# Altium PCB PCB2.PcbDoc
Units mil, origin at the board's own origin, x right, y up, seen from the top; angles counter-clockwise.
Board outline 3010.03 x 3210.03 mil, 2 copper layers (Top Layer, Bottom Layer); 28 components, 51 nets, 208 pads, 2 vias.
Unrouted connection lines stored in the file: 135.
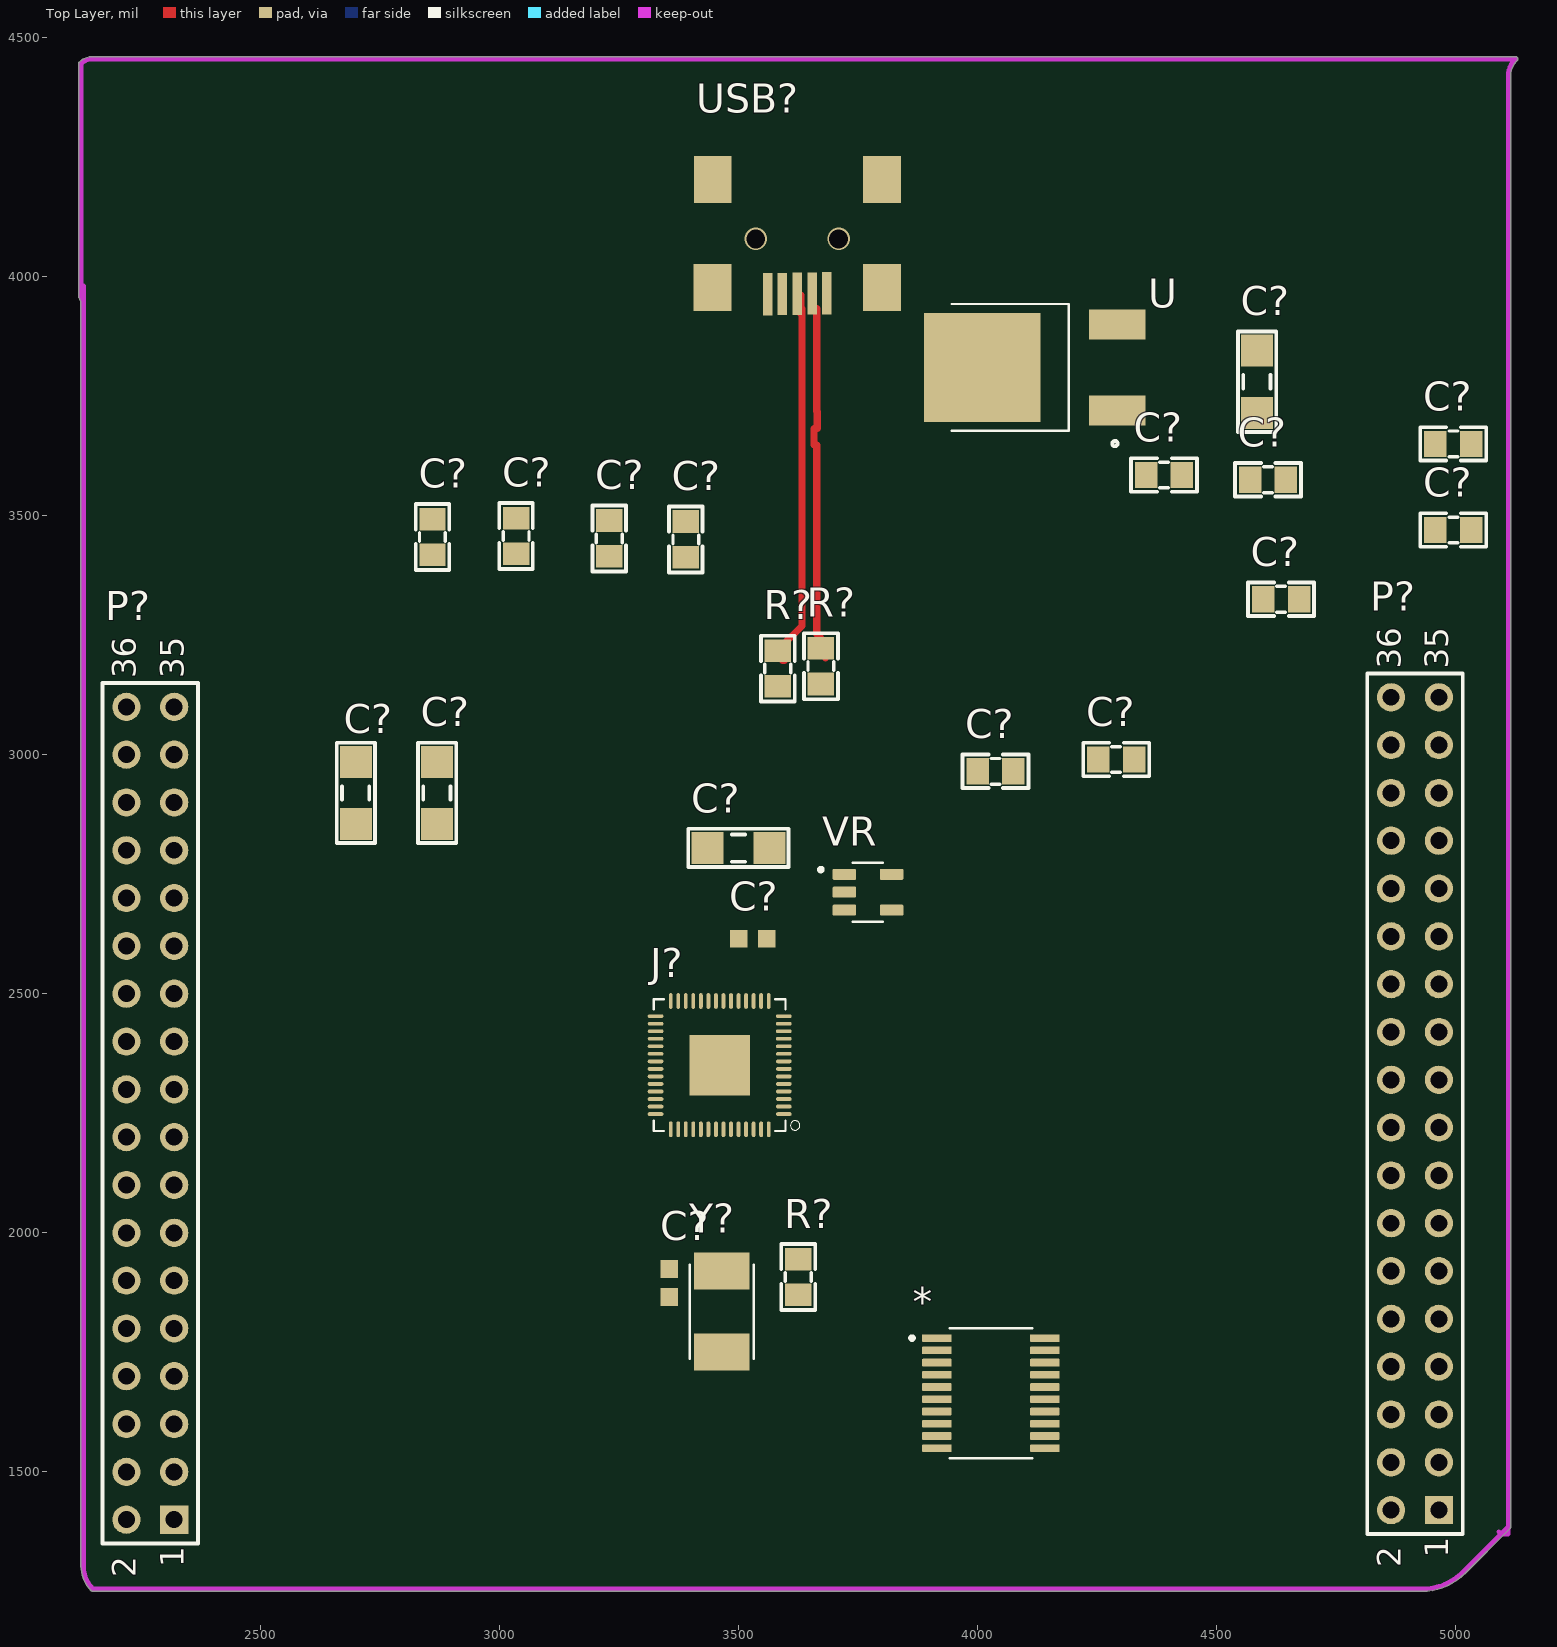
[diagram p0: Top Layer view]
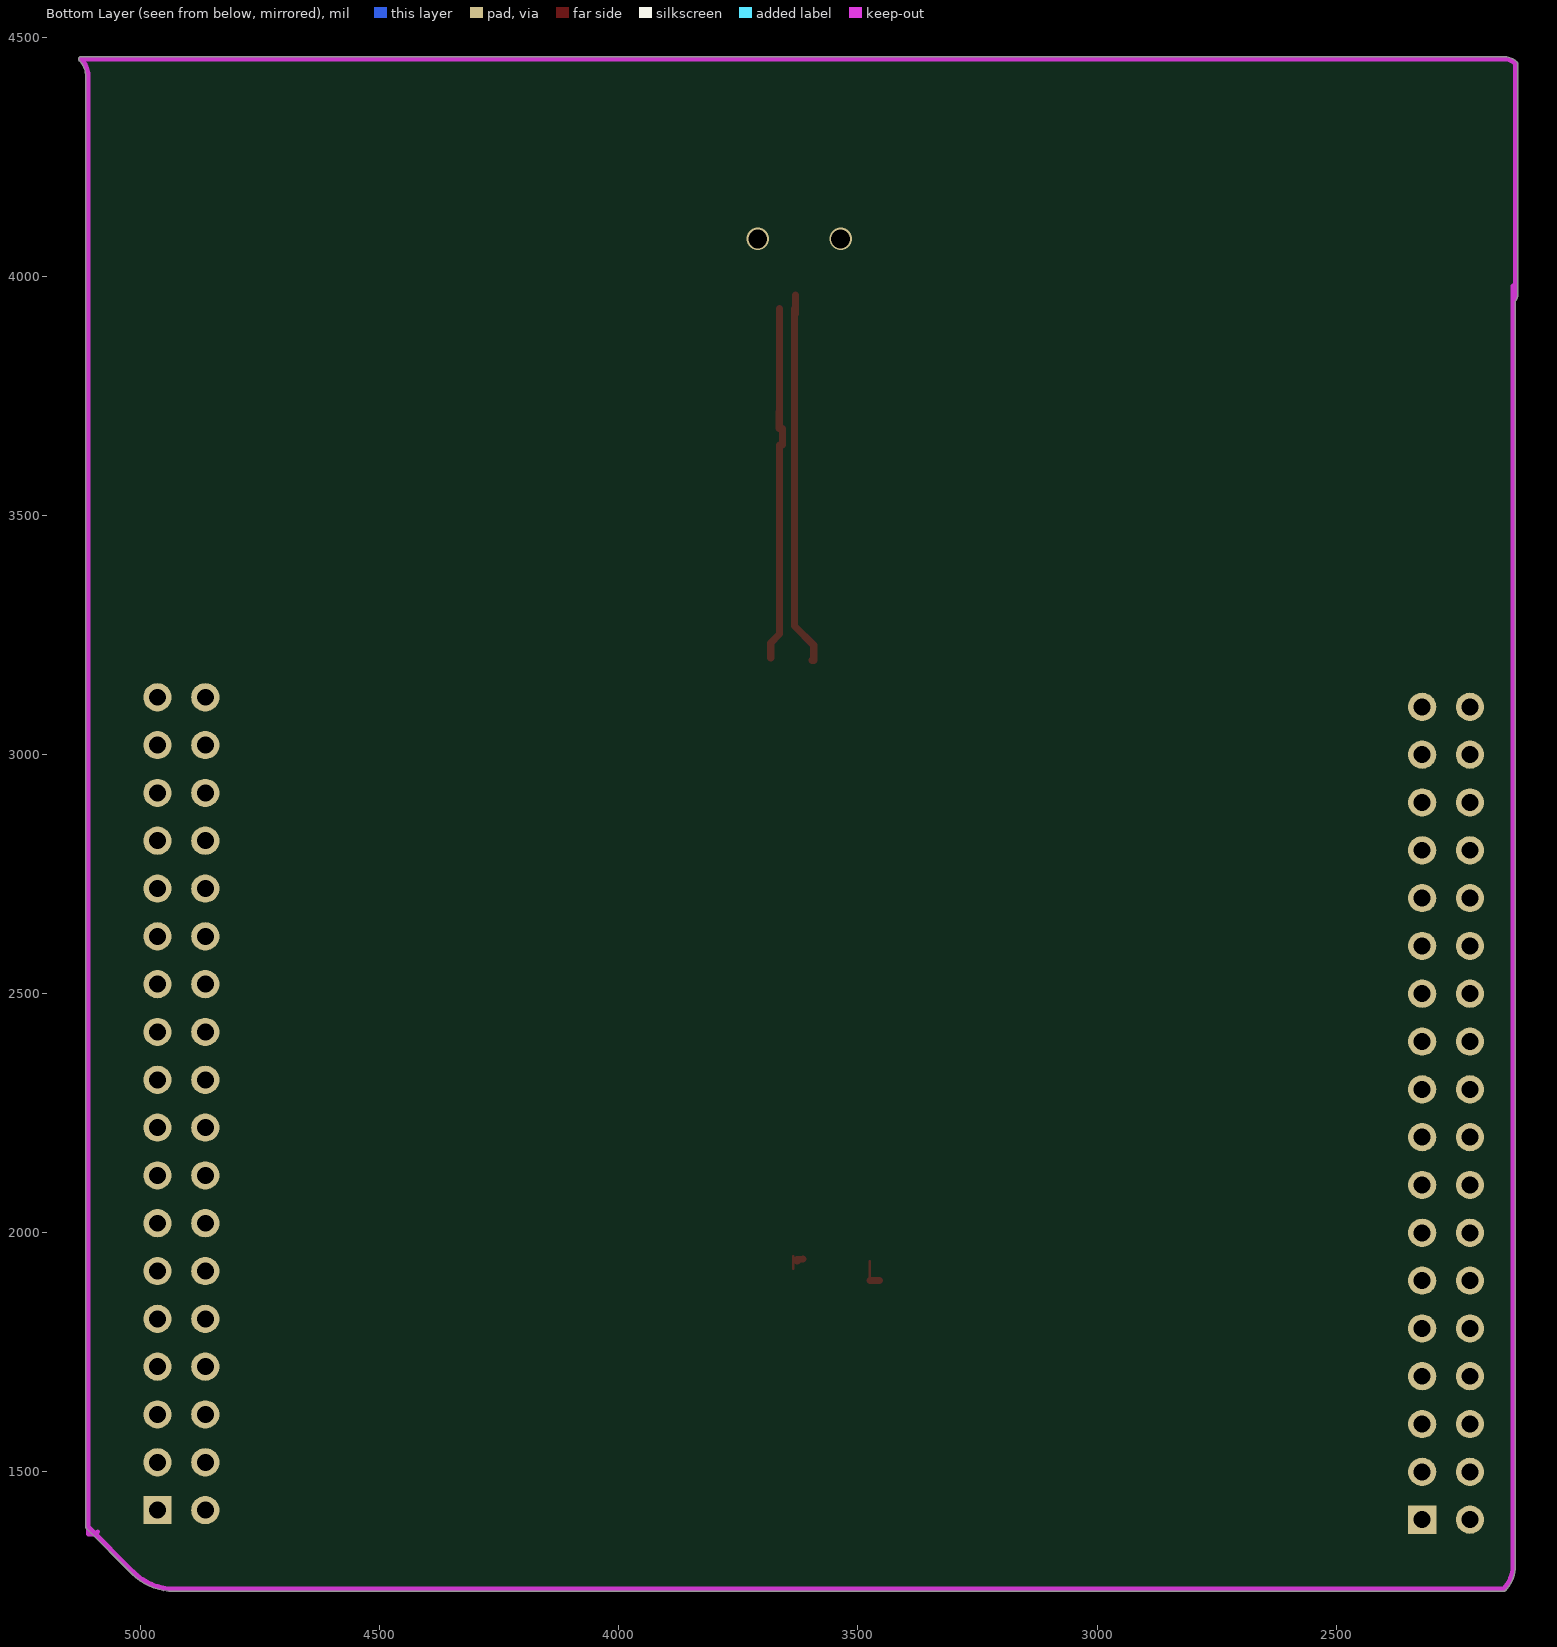
[diagram p1: Bottom Layer view, seen from below]

## Layer stack, top to bottom
Top Solder: solder mask 0.4, Solder Resist, Dk 3.5
Top Layer: signal copper 1.4
Dielectric 1: dielectric 12.6, FR-4, Dk 4.8
Bottom Layer: signal copper 1.4
Bottom Solder: solder mask 0.4, Solder Resist, Dk 3.5

## Board outline
2146.45,1251.45 cw(c2198.28,1303.28) 2124.99,1303.28 2124.99,3948.08 cw(c2142.07,3962.07) 2119.99,3962.07 2119.99,4445 cw(c2125,4445) 2121.45,4448.55 cw(c2149.14,4420.86) 2149.14,4460.02 5125,4460.02 cw(c5125,4455) 5130.02,4455 cw(c5125,4455) 5128.52,4451.43 ccw(c5161.21,4418.79) 5115.02,4418.79 5115.02,1385 cw(c5110,1385) 5113.53,1381.44 5018.9,1286.81 cw(c4930,1375.71) 4930,1249.98 2150,1249.98 cw(c2150,1255)

## Design rules (kind name [scope] priority, off if disabled: settings)
Clearance [All] p1: gap=10 ignorepadtopadclearanceinfootprint=FALSE except(0: Arc-Hole Track-Hole SMDPad-Hole THPad-Hole Via-Hole Fill-Hole Poly-Hole Region-Hole Text-Hole)
DiffPairsRouting [All] p1: maxlimit=10 minlimit=5 mostfreqgap=10 toplayer_minwidth=5 toplayer_maxwidth=15 toplayer_prefwidth=15 bottomlayer_minwidth=5 bottomlayer_maxwidth=15 bottomlayer_prefwidth=15 maxuncoupledlength=500
PolygonConnect [All] p1: connectstyle=Relief reliefconductorwidth=10 reliefentries=4 polygonreliefangle="90 Angle" airgapwidth=10
RoomDefinition Sheet2 [InComponentClass('Sheet2')] p1: confinementstyle=ConfineIn formatcopy=TRUE lockcomponents=FALSE outline 2650,2670.04 2985,2670.04 2985,3090.04 2650,3090.04
RoutingVias [All] p1: holewidth=40 width=30 viastyle="Through Hole" minholewidth=20 minwidth=10 maxholewidth=60 maxwidth=50
SolderMaskExpansion [All] p1: expansion=4 istentingtop=FALSE
Width [InNetClass('All Nets')] p1: maxlimit=15 minlimit=5 preferedwidth=10
29 further rules are at their usual default settings.

## Classes and differential pairs
net class A: USB_D+ USB_D-
component class Sheet2: * C? J? P? R? U USB? VR Y?

## Components (designator, comment, footprint, x,y, rotation, side; value= is the part's Value field where it differs from the comment)
* "PCM5101APW" PCM5101APW -12437.01,7834.57 r0 top
C? "CBR06C270F5GAC" CAPC1608X87N 3355,1895.04 r270 top
C? "CBR06C270F5GAC" CAPC1608X87N 3530,2615.04 r180 top
C? "105" "tu 0805" 4995,3650 r0 top
C? "105" "tu 0805" 4995,3470 r0 top
C? "104" "tu 0805" 4290,2990.04 r0 top
C? "104" "tu 0805" 3034.87,3457.27 r90 top
C? "103" "tu 1206" 2870,2920.04 r90 top
C? "104" "tu 0805" 4607.43,3575.21 r0 top
C? "104" "tu 0805" 4390,3585.08 r0 top
C? "104" "tu 0805" 3390,3450.04 r90 top
C? "104" "tu 0805" 2860,3455.04 r90 top
C? "104" "tu 0805" 3229.87,3452.27 r90 top
C? "103" "tu 1206" 2700,2920.04 r90 top
C? "104" "tu 0805" 4635,3325.04 r0 top
C? "104" "tu 0805" 4037.42,2965.17 r0 top
C? "105" "tu 1206" 4585,3780.04 r90 top
C? "105" "tu 1206" 3500,2805.04 r180 top
J? "RP2040" QFN40P695X695X90-57T320N 3460.85,2350.67 r180 top
P? "Header 18X2" HDR2X18 4965,1420.04 r90 top
P? "Header 18X2" HDR2X18 2320,1400.04 r90 top
R? "1k" "tro smd 0805" 3622.61,1907.47 r90 top
R? "27" "tro smd 0805" 3670,3185.04 r90 top
R? "27" "tro smd 0805" 3580,3180.04 r90 top
U "NCP1117DT33G" VREG_NCP1117DT33G 4132.05,3810.04 r90 top
USB? "USB Mini 5p SMD" "USB Mini 5p SMD" 3620,4100.04 r0 top
VR "TLV70033DDCR" SOT95P280X110-5N 3770.99,2712.38 r0 top
Y? "ABM3-12.000MHZ-B2-T" XTAL500X320X130N 3465,1835.39 r270 top

## Footprints (in the part's own frame and the unit in brackets; to place one, negate y for a bottom-side part, rotate by r counter-clockwise, add the part's x,y. Pads: shape width x height; smd on the part's side, far side on the other; paste and mask are expansions set on the pad)
CAPC1608X87N [mm]
  rect 0.94x0.93 smd: 1(-0.745,0) 2(0.745,0)
  body extent -0.8,-0.38 0.8,0.42, height 0.87
HDR2X18 [mm] "Connector; Header; 18x2 Position"
  rect 1.5x1.5 hole 0.9: 1(0,0)
  round 1.5 hole 0.9: 2(0,2.54) 3(2.54,0) 4(2.54,2.54) 5(5.08,0) 6(5.08,2.54) 7(7.62,0) 8(7.62,2.54) 9(10.16,0) 10(10.16,2.54) 11(12.7,0) 12(12.7,2.54) 13(15.24,0) 14(15.24,2.54) 15(17.78,0) 16(17.78,2.54) 17(20.32,0) 18(20.32,2.54) 19(22.86,0) 20(22.86,2.54) 21(25.4,0) 22(25.4,2.54) 23(27.94,0) 24(27.94,2.54) 25(30.48,0) 26(30.48,2.54) 27(33.02,0) 28(33.02,2.54) 29(35.56,0) 30(35.56,2.54) 31(38.1,0) 32(38.1,2.54) 33(40.64,0) 34(40.64,2.54) 35(43.18,0) 36(43.18,2.54)
  silkscreen extent -1.27,-1.27 44.45,3.81
PCM5101APW [mm]
  rrect25% 1.57x0.41 smd: 1(415.341,-153.793) 2(415.341,-154.443) 3(415.341,-155.093) 4(415.341,-155.743) 5(415.341,-156.393) 6(415.341,-157.043) 7(415.341,-157.693) 8(415.341,-158.343) 9(415.341,-158.993) 10(415.341,-159.643) 11(421.081,-159.643) 12(421.081,-158.993) 13(421.081,-158.343) 14(421.081,-157.693) 15(421.081,-157.043) 16(421.081,-156.393) 17(421.081,-155.743) 18(421.081,-155.093) 19(421.081,-154.443) 20(421.081,-153.793)
  silkscreen extent 413.92,-160.17 420.41,-153.27, body extent 415.01,-159.97 421.41,-153.47, height 1.2
QFN40P695X695X90-57T320N [mm]
  oval 0.835x0.2 smd: 1(-3.408,2.6) 2(-3.408,2.2) 3(-3.408,1.8) 4(-3.408,1.4) 5(-3.408,1) 6(-3.408,0.6) 7(-3.408,0.2) 8(-3.408,-0.2) 9(-3.408,-0.6) 10(-3.408,-1) 11(-3.408,-1.4) 12(-3.408,-1.8) 13(-3.408,-2.2) 14(-3.408,-2.6) 29(3.408,-2.6) 30(3.408,-2.2) 31(3.408,-1.8) 32(3.408,-1.4) 33(3.408,-1) 34(3.408,-0.6) 35(3.408,-0.2) 36(3.408,0.2) 37(3.408,0.6) 38(3.408,1) 39(3.408,1.4) 40(3.408,1.8) 41(3.408,2.2) 42(3.408,2.6)
  oval 0.2x0.835 smd: 15(-2.6,-3.408) 16(-2.2,-3.408) 17(-1.8,-3.408) 18(-1.4,-3.408) 19(-1,-3.408) 20(-0.6,-3.408) 21(-0.2,-3.408) 22(0.2,-3.408) 23(0.6,-3.408) 24(1,-3.408) 25(1.4,-3.408) 26(1.8,-3.408) 27(2.2,-3.408) 28(2.6,-3.408) 43(2.6,3.408) 44(2.2,3.408) 45(1.8,3.408) 46(1.4,3.408) 47(1,3.408) 48(0.6,3.408) 49(0.2,3.408) 50(-0.2,3.408) 51(-0.6,3.408) 52(-1,3.408) 53(-1.4,3.408) 54(-1.8,3.408) 55(-2.2,3.408) 56(-2.6,3.408)
  rect 3.2x3.2 smd: 57(0,0)
  silkscreen extent -4.25,-3.5 3.5,3.5, body extent -3.89,-3.9 3.86,3.85, height 0.9
SOT95P280X110-5N [mm]
  rrect25% 1.25x0.59 smd: 1(-1.255,0.95) 2(-1.255,0) 3(-1.255,-0.95) 4(1.255,-0.95) 5(1.255,0.95)
  silkscreen extent -2.6,-1.57 0.8,1.56, body extent -1.4,-1.45 1.4,1.45, height 1.1
"tro smd 0805" [mm]
  rect 1.2x1.4 smd: 1(-0.946,-0.061) 2(0.954,-0.061)
  silkscreen extent -1.75,-0.97 1.75,0.84, body extent -1.56,-0.76 1.44,0.64, height 0.53
"tu 0805" [mm] "Compoment SMD 80x50mil"
  rect 1.2x1.4 smd: 1(-0.946,-0.003) 2(0.954,-0.003)
  silkscreen extent -1.75,-0.89 1.75,0.89, body extent -1.01,-0.64 1.01,0.63, height 0.61
"tu 1206" [mm]
  rect 1.7x1.7 smd: 1(-1.65,0) 2(1.65,0)
  silkscreen extent -2.67,-1.02 2.67,1.02, body extent -1.57,-0.8 1.63,0.8, height 0.94
"USB Mini 5p SMD" [mm]
  rect 0.5x2.25 smd: 1(1.651,-3.429) 2(0.864,-3.442) 3(0.076,-3.454) 4(-0.711,-3.467) 5(-1.499,-3.48)
  rect 2x2.5 smd: 5(-4.424,-3.124) 5(-4.42,2.616) 5(4.576,-3.124) 5(4.58,2.616)
  body extent -5.27,-3.8 5.43,5.4, height 3.95
VREG_NCP1117DT33G [mm]
  rect 1.6x3 smd: 1(-2.285,-4.08) 3(2.285,-4.08)
  rect 5.8x6.2 smd: 4(0,3.1)
  silkscreen extent -4.19,-4.09 3.36,4.72, body extent -3.2,-4.95 3.3,4.95, height 2.49
XTAL500X320X130N [mm]
  rect 1.95x2.95 smd: 1(-2.15,0) 2(2.15,0)
  silkscreen extent -2.5,-1.7 2.5,1.7, body extent -2.5,-1.65 2.5,1.65, height 1.3

## Part data
C? C?: "CAP CER 27PF 50V NP0 0603", Package=None, Availability=Unavailable, MP=CBR06C270F5GAC, Price=None
C? C?: library part "Tu 0805 105 50V 10%", "Dán", Chung_Loai=Dán, Don_Vi=Con, Ma_Hang=MH004552, So_Chan=2, Ten_Linh_Kien="Tụ 0805 105-1uF 10% 50V"
C? C? C? C? C? C? C? C? C?: library part "Tu 0805 104 50V 10%", "Dán", Chung_Loai=Dán, Don_Vi=Con, Ma_Hang=MH004551, So_Chan=2, Ten_Linh_Kien="Tụ 0805 104-100nF 10% 50V"
C? C?: library part "Tu 1206 103 50V 10%", "Dán", Chung_Loai=Dán, Don_Vi=Con, Ma_Hang=MH004543, So_Chan=2, Ten_Linh_Kien="Tụ 1206 103-10nF 10% 50V"
C? C?: library part "Tu 1206 105 50V 20%", "Dán", Chung_Loai=Dán, Don_Vi=Con, Ma_Hang=MH004545, So_Chan=2, Ten_Linh_Kien="Tụ 1206 105-1uF 20% 50V"
J?: "RP2040 Raspberry Pi Pico - ARMÂ® CortexÂ®-M0+ MCU 32-Bit Embedded Evaluation Board", Package=Package, Availability="No availability data", Check_prices=https://www.snapeda.com/parts/RP2040/Raspberry%20Pi/view-part/5800506/?ref=eda, MF="Raspberry Pi", MP=RP2040, Price=None, SnapEDA_Link=https://www.snapeda.com/parts/RP2040/Raspberry%20Pi/view-part/5800506/?ref=snap
P? P?: "Header, 18-Pin, Dual row", LatestRevisionDate=17-Jul-2002, LatestRevisionNote="Re-released for DXP Platform.", Publisher="Altium Limited"
R?: library part "Tro 0805 1% 1k", "Dán", Chung_Loai=Dán, Don_Vi=Con, Ma_Hang=MH005468, So_Chan=2, Ten_Linh_Kien="Trở 0805 1% 1k"
R? R?: library part "Tro 0805 5% 100R", "Dán", Chung_Loai=Dán, Don_Vi=Con, Ma_Hang=MH005251, So_Chan=2, Ten_Linh_Kien="Trở 0805 5% 100R"
U: "Linear Voltage Regulator IC 1 Output 1A DPAK", Package="DPAK ON Semiconductor", Availability=Unavailable, MF="ON Semiconductor", MP=NCP1117DT33G, Price=None, SnapEDA_Link=https://www.snapeda.com/parts/NCP1117DT33G/ON%20Semiconductor/view-part/300669/?ref=snap
USB?: "USB Type B", Ma_Hang=MH001022, Ten="MiniUSB 5P SMD"
VR: "200-mA, high-PSRR, low-IQ, low-dropout voltage regulator with enable 5-SOT-23-THIN -40 to 125", Package="SOT-23-THN-5 Texas Instruments", BuyPart=https://www.snapeda.com/parts/TLV70033DDCR/Texas%20Instruments/view-part/356821/?ref=eda, Digi-Key_Part_Number=296-27937-1-ND, DigiKey-Purchase-URL=https://snapeda.com/shop?store=DigiKey&id=356821, MF="Texas Instruments", Mouser-Purchase-URL=https://snapeda.com/shop?store=Mouser&id=356821, MP=TLV70033DDCR, SnapEDA_Link=https://www.snapeda.com/parts/TLV70033DDCR/Texas%20Instruments/view-part/356821/?ref=snap, Texas_Instruments-Purchase-URL=https://snapeda.com/shop?store=Texas+Instruments&id=356821
Y?: "12MHz Â±20ppm Crystal 18pF 60 Ohms 2-SMD, No Lead", Package="SMD-2 Abracon", Availability=Good, Check_prices=https://www.snapeda.com/parts/ABM3-12.000MHZ-B2-T/Abracon%20LLC/view-part/106373/?ref=eda, MF=Abracon, MP=ABM3-12.000MHZ-B2-T, Price=None, Purchase-URL=https://pricing.snapeda.com/search/part/ABM3-12.000MHZ-B2-T/?ref=eda, SnapEDA_Link=https://www.snapeda.com/parts/ABM3-12.000MHZ-B2-T/Abracon%20LLC/view-part/106373/?ref=snap

## Via types
v1: diameter 47.24, hole 39.37, Top Layer to Bottom Layer, 2 vias

## Nets (pads, with @x,y where several pads share a name; then routed paths per layer and width w, separated by ;. In a path a pad name is that pad's centre, name@x,y a point inside that pad or via, vN(x,y) a via of type N, cw(c..) or ccw(c..) an arc to the next point about the centre after c; other vN are vias at no path point)
+1V1: C?.2@3435.04,2805.04 C?.2@4075,2965.04 C?.2@4327.57,2989.91 J?.23 J?.44 J?.45 J?.50
+3V3: C?.1@4585,3715.08 C?.2@2860.13,3492.61 C?.2@2870,2985 C?.2@3035,3494.84 C?.2@3230,3489.84 C?.2@3390.13,3487.61 C?.2@4427.57,3584.95 C?.2@4645,3575.08 C?.2@4672.57,3324.91 C?.2@5032.57,3469.87 J?.1 J?.10 J?.22 J?.33 J?.42 J?.43 J?.48 J?.49 P?.2@4865,1420.04 U.4 VR.5
GND: *.11 C?.1@2700,2855.08 C?.1@2860.13,3417.81 C?.1@2870,2855.08 C?.1@3035,3420.04 C?.1@3230,3415.04 C?.1@3355,1924.37 C?.1@3390.13,3412.81 C?.1@3559.33,2615.04 C?.1@3564.96,2805.04 C?.1@4000.2,2965.04 C?.1@4252.77,2989.91 C?.1@4352.77,3584.95 C?.1@4570.2,3575.08 C?.1@4597.77,3324.91 C?.1@4957.77,3469.87 C?.1@4957.77,3649.87 C?.2@4585,3845 J?.19 J?.57 P?.1@4965,1420.04 P?.2@2220,1400.04 P?.3@4965,1520.04 P?.4@2220,1500.04 P?.5@4965,1620.04 P?.6@2220,1600.04 P?.7@4965,1720.04 P?.8@2220,1700.04 P?.9@4965,1820.04 P?.10@2220,1800.04 P?.11@4965,1920.04 P?.12@2220,1900.04 P?.13@4965,2020.04 P?.14@2220,2000.04 P?.15@4965,2120.04 P?.16@2220,2100.04 P?.17@4965,2220.04 P?.18@2220,2200.04 P?.19@4965,2320.04 P?.20@2220,2300.04 P?.21@4965,2420.04 P?.22@2220,2400.04 P?.23@4965,2520.04 P?.24@2220,2500.04 P?.25@4965,2620.04 P?.26@2220,2600.04 P?.27@4965,2720.04 P?.28@2220,2700.04 P?.29@4965,2820.04 P?.30@2220,2800.04 P?.31@4965,2920.04 P?.32@2220,2900.04 P?.33@4965,3020.04 P?.34@2220,3000.04 P?.35 P?.36 U.1 USB?.5 VR.2
GPIO0: J?.2 P?.4@4865,1520.04
GPIO1: J?.3 P?.6@4865,1620.04
GPIO2: J?.4 P?.8@4865,1720.04
GPIO3: J?.5 P?.10@4865,1820.04
GPIO4: J?.6 P?.12@4865,1920.04
GPIO5: J?.7 P?.14@4865,2020.04
GPIO6: J?.8 P?.16@4865,2120.04
GPIO7: J?.9 P?.18@4865,2220.04
GPIO8: J?.11 P?.20@4865,2320.04
GPIO9: J?.12 P?.22@4865,2420.04
GPIO10: J?.13 P?.24@4865,2520.04
GPIO11: J?.14 P?.26@4865,2620.04
GPIO12: J?.15 P?.28@4865,2720.04
GPIO13: J?.16 P?.30@4865,2820.04
GPIO14: J?.17 P?.32@4865,2920.04
GPIO15: J?.18 P?.34@4865,3020.04
GPIO16: J?.27 P?.27@2320,2700.04
GPIO17: J?.28 P?.25@2320,2600.04
GPIO18: J?.29 P?.23@2320,2500.04
GPIO19: J?.30 J?.31 P?.21@2320,2400.04
GPIO20: J?.32 P?.19@2320,2300.04
GPIO21: P?.17@2320,2200.04
GPIO22: J?.34 P?.15@2320,2100.04
GPIO23: J?.35 P?.13@2320,2000.04
GPIO24: J?.36 P?.11@2320,1900.04
GPIO25: J?.37 P?.9@2320,1800.04
GPIO26/ADC0: J?.38 P?.7@2320,1700.04
GPIO27/ADC1: J?.39 P?.5@2320,1600.04
GPIO28/ADC2: J?.40 P?.3@2320,1500.04
GPIO29/ADC3: J?.41 P?.1@2320,1400.04
NetC?_2: C?.2@3355,1865.71 R?.1@3625,1870.24 Y?.2
NetJ?_46: J?.46 R?.1@3582.39,3142.81
NetJ?_47: J?.47 R?.1@3672.39,3147.81
QSPI_SCLK: J?.52
QSPI_SD0: J?.53
QSPI_SD1: J?.55
QSPI_SD2: J?.54
QSPI_SD3: J?.51
QSPI_SS_N: J?.56
RUN: J?.26 P?.29@2320,2800.04
SWCLK: J?.24 P?.33@2320,3000.04
SWDIO: J?.25 P?.31@2320,2900.04
USB_D+: R?.2@3672.39,3222.61 USB?.2 | length 751.5
  Top Layer w15: 3664,3933.02 3664,3765 3664,3717.5 3664.73,3717.5 3664.73,3682.5 3658,3682.5 3658,3647.5 3664,3647.5 3664,3640 3664,3252.09 3682.39,3233.7 R?.2@3682.39,3202.57
  other v1: 3536.39,4078.61
USB_D-: R?.2@3582.39,3217.62 USB?.3 | length 795.9
  Top Layer w15: R?.2@3596.33,3197.58 3592.39,3197.58 3592.39,3228.7 3633,3269.3 3633,3932.52 ; USB?.3@3630.34,3961.66 3630.34,3922.52 USB?.3@3631.1,3921.76
VBUS: C?.2@2700,2985 U.3 USB?.1
VSYS: C?.2@5032.57,3649.87 VR.1 VR.3
XIN: C?.2@3500.67,2615.04 J?.20 Y?.1 | length 60.6
  Top Layer w5: Y?.1@3475,1900 Y?.1@3475,1940.89
  Top Layer w15: Y?.1@3455.32,1900 Y?.1@3475,1900
XOUT: J?.21 R?.2@3625,1945.04 | length 44.6
  Top Layer w5: R?.2@3635,1925 R?.2@3635,1951.6
  Top Layer w15: R?.2@3614.94,1945.06 R?.2@3625.33,1944.04 ; R?.2@3625.33,1944.04 3626.81,1943.89 3626.81,1941.12 R?.2@3625.33,1944.04
pads on no net: *.1 *.2 *.3 *.4 *.5 *.6 *.7 *.8 *.9 *.10 *.12 *.13 *.14 *.15 *.16 *.17 *.18 *.19 *.20 USB?.4 VR.4
copper on no net:
  other v1: 3709.61,4078.61

## Keep-outs
Keep-Out Layer:
  lines w10: 2125,4029.14 2125,4445 cw(c2149.14,4420.86) 2149.14,4455 5125,4455 ccw(c5161.21,4418.79) 5110,4418.79 5110,1370 5102.07,1370 cw(c5102.07,1387.07) 5090,1375 ; 2125,4060 2125,3962.07 ccw(c2142.07,3962.07) 2130,3950 ; 2130,3980 2130,1303.28 ccw(c2198.28,1303.28) 2150,1255 4930,1255 ccw(c4930,1375.71) 5015.36,1290.36 5110,1385

## Text inside footprints (layer, text, board x,y; h text height)
P?: Top Overlay "36" at 2240,3160.04 h50 r90; Top Overlay "35" at 2340,3160.04 h50 r90; Top Overlay "1" at 2340,1300.04 h50 r90; Top Overlay "2" at 2240,1280.04 h50 r90
P?: Top Overlay "36" at 4885,3180.04 h50 r90; Top Overlay "35" at 4985,3180.04 h50 r90; Top Overlay "1" at 4985,1320.04 h50 r90; Top Overlay "2" at 4885,1300.04 h50 r90